# EAGLE board schematics (EAGLE 9.3.0)

Size 100 x 100 mm. Coordinates in mm from the lower left corner, seen from the top.
Outline: 0,0 100,0 100,100 0,100 0,0
Copper layers (1*16): Top 0.035mm / dielectric 1.5mm / Bottom 0.035mm
Design rules "default": minimum track width 6mil, minimum drill 0.35mm, track to track 6mil, track to pad 6mil, pad to pad 6mil, via to via 6mil, smd to smd 6mil, copper to edge 40mil, drill to drill 6mil, minimum pad ring 10mil, minimum via ring 8mil, stop-mask expansion 4mil, vias tented up to drill 0mil, thermal gap 10mil

## Footprints (pad centres in the part's own frame; a part is rotated, then mirrored left to right if it is on the bottom)
C025-025X050 = drill 0.813 octagon: 1 -1.27,0; 2 1.27,0
B45181B = drill 0.813: + -2.54,0 | drill 0.813 octagon: - 2.54,0
USB-MB-H = drill 0.8: D+ 5.1,0; D- 3.9,0.8; GND 5.1,-1.6; ID 3.9,-0.8; VBUS 5.1,1.6 | drill 1.9: P$6 0,-3.65; P$7 0,3.65
1X08 = drill 1.016 pad 1.88: 1 0,0; 2 2.54,0; 3 5.08,0; 4 7.62,0; 5 10.16,0; 6 12.7,0; 7 15.24,0; 8 17.78,0
LED3MM = drill 0.813 octagon: A -1.27,0; K 1.27,0
0207/10 = drill 0.813 octagon: 1 -5.08,0; 2 5.08,0
TQFP44 = smd 1.5 x 0.5: 1 -5.8,4; 2 -5.8,3.2; 3 -5.8,2.4; 4 -5.8,1.6; 5 -5.8,0.8; 6 -5.8,0; 7 -5.8,-0.8; 8 -5.8,-1.6; 9 -5.8,-2.4; 10 -5.8,-3.2; 11 -5.8,-4; 23 5.8,-4; 24 5.8,-3.2; 25 5.8,-2.4; 26 5.8,-1.6; 27 5.8,-0.8; 28 5.8,0; 29 5.8,0.8; 30 5.8,1.6; 31 5.8,2.4; 32 5.8,3.2; 33 5.8,4 | smd 0.5 x 1.5: 12 -4,-5.8; 13 -3.2,-5.8; 14 -2.4,-5.8; 15 -1.6,-5.8; 16 -0.8,-5.8; 17 0,-5.8; 18 0.8,-5.8; 19 1.6,-5.8; 20 2.4,-5.8; 21 3.2,-5.8; 22 4,-5.8; 34 4,5.8; 35 3.2,5.8; 36 2.4,5.8; 37 1.6,5.8; 38 0.8,5.8; 39 0,5.8; 40 -0.8,5.8; 41 -1.6,5.8; 42 -2.4,5.8; 43 -3.2,5.8; 44 -4,5.8
SLIDE = drill 0.8: 1 -2,0; 2 0,0; 3 2,0 | drill 1: P$1 -4,0; P$2 4,0
TO92 = drill 0.813 octagon: 1 -1.27,0; 2 0,1.905; 3 1.27,0
PB = drill 1.016 pad 1.88: 1 -2.54,0; 2 2.54,0
SNAP = drill 1.016 pad 1.88: 1 -5.08,0; 2 -2.54,0; 3 0,0; 4 2.54,0; 5 5.08,0
OSC = drill 1.016 pad 1.88: 1 -2.54,0; 2 0,0; 3 2.54,0

## Placement (x,y rotation side)
C1  0.1uF  [C025-025X050]  -16.51,30.48 0 top  (outside the outline)
C2  0.1uF  [C025-025X050]  -22.86,30.48 0 top  (outside the outline)
C3  0.1uF  [C025-025X050]  -29.21,30.48 0 top  (outside the outline)
C4  0.1uF  [C025-025X050]  -35.56,30.48 0 top  (outside the outline)
C5  0.1uF  [C025-025X050]  -41.91,30.48 0 top  (outside the outline)
C6  10uF  [B45181B]  -36.83,20.32 0 top  (outside the outline)
C7  10uF  [B45181B]  -49.53,20.32 0 top  (outside the outline)
C8  0.1uF  [C025-025X050]  -48.26,30.48 0 top  (outside the outline)
J1  USB-MB-H  [USB-MB-H]  3.81,92.71 0 top
J2  [1X08]  74.93,41.91 90 top
J3  [1X08]  -53.34,52.07 0 top  (outside the outline)
LED1  red  [LED3MM]  -54.61,48.26 0 top  (outside the outline)
LED2  green  [LED3MM]  -44.45,48.26 0 top  (outside the outline)
R1  330  [0207/10]  -19.05,41.91 0 top  (outside the outline)
R2  330  [0207/10]  -31.75,41.91 0 top  (outside the outline)
R3  10k  [0207/10]  -44.45,41.91 0 top  (outside the outline)
R4  10k  [0207/10]  -19.05,46.99 0 top  (outside the outline)
U$1  PIC32MX270F256D  [TQFP44]  53.34,49.53 0 top
U$2  SLIDE  [SLIDE]  -22.86,20.32 0 top  (outside the outline)
U$3  L4931  [TO92]  -34.29,48.26 0 top  (outside the outline)
U$4  RESET  [PB]  -20.32,36.83 0 top  (outside the outline)
U$5  USER  [PB]  -31.75,36.83 0 top  (outside the outline)
U$6  SNAP  [SNAP]  -41.91,36.83 0 top  (outside the outline)
U$7  8Mhz  [OSC]  -53.34,36.83 0 top  (outside the outline)

## Library data of the parts
C1-C8 J1 LED1 LED2 R1-R4 U$1-U$7 = custom_lib
J2 J3 = custom_lib; PROD_ID: CONN-08438

## Nets
+3V3: C1.1 C2.1 C3.1 C5.1 C7.+ C8.1 J2.7 LED1.A R3.2 R4.2 U$1.10 U$1.17 U$1.28 U$1.40 U$3.1 U$6.2
+5V: C4.1 J3.7 U$1.42 U$2.3 U$3.3
A0: J2.1 U$1.19
A1: J2.2 U$1.20
A4/LED: J2.6 LED2.A U$1.34
B2: J2.3 U$1.23
B3: J2.4 U$1.24
B4/USER: J2.5 R4.1 U$1.33 U$5.1
B7: J3.6 U$1.43
B8: J3.5 U$1.44
B9: J3.4 U$1.1
B13: J3.3 U$1.11
B14: J3.2 U$1.14
B15: J3.1 U$1.15
D+: J1.D+ U$1.8
D-: J1.D- U$1.9
GND: C1.2 C2.2 C3.2 C4.2 C5.2 C6.+ C7.- C8.2 J1.GND J2.8 J3.8 R1.1 R2.1 U$1.6 U$1.16 U$1.29 U$1.39 U$3.2 U$4.2 U$5.2 U$6.3 U$7.2
MCLR: R3.1 U$1.18 U$4.1 U$6.1
N$1: C6.- U$1.7
N$2: J1.VBUS U$2.2
N$3: LED2.K R2.2
N$4: LED1.K R1.2
N$5: U$1.30 U$7.3
N$6: U$1.31 U$7.1
PGC: U$1.22 U$6.5
PGD: U$1.21 U$6.4
USBID: J1.ID U$1.41

## Tracks (layer width: path | path; a pad name or v marks a point on that pad's centre or on a via)
+3V3  (15 unrouted)
+5V  (4 unrouted)
A0  (1 unrouted)
A1  (1 unrouted)
A4/LED  (2 unrouted)
B2  (1 unrouted)
B3  (1 unrouted)
B4/USER  (3 unrouted)
B7  (1 unrouted)
B8  (1 unrouted)
B9  (1 unrouted)
B13  (1 unrouted)
B14  (1 unrouted)
B15  (1 unrouted)
D+  (1 unrouted)
D-  (1 unrouted)
GND  (21 unrouted)
MCLR  (3 unrouted)
N$1  (1 unrouted)
N$2  (1 unrouted)
N$3  (1 unrouted)
N$4  (1 unrouted)
N$5  (1 unrouted)
N$6  (1 unrouted)
PGC  (1 unrouted)
PGD  (1 unrouted)
USBID  (1 unrouted)